# EAGLE board TurnON.v1 (EAGLE 5.11)
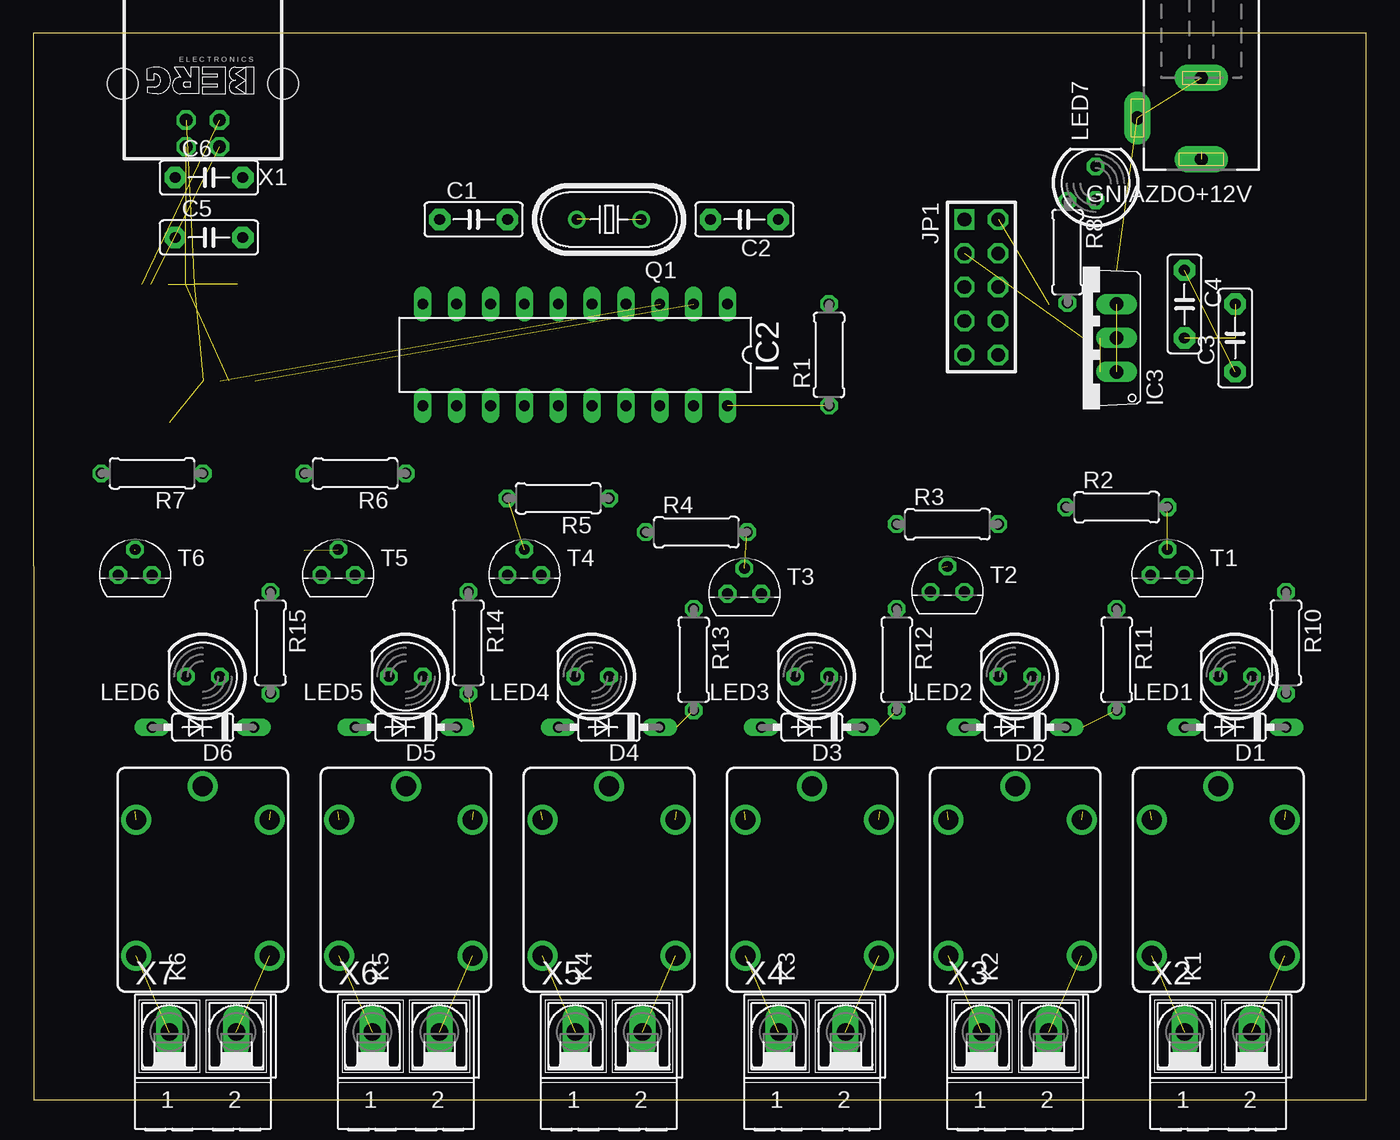
[diagram p0: board, top side]
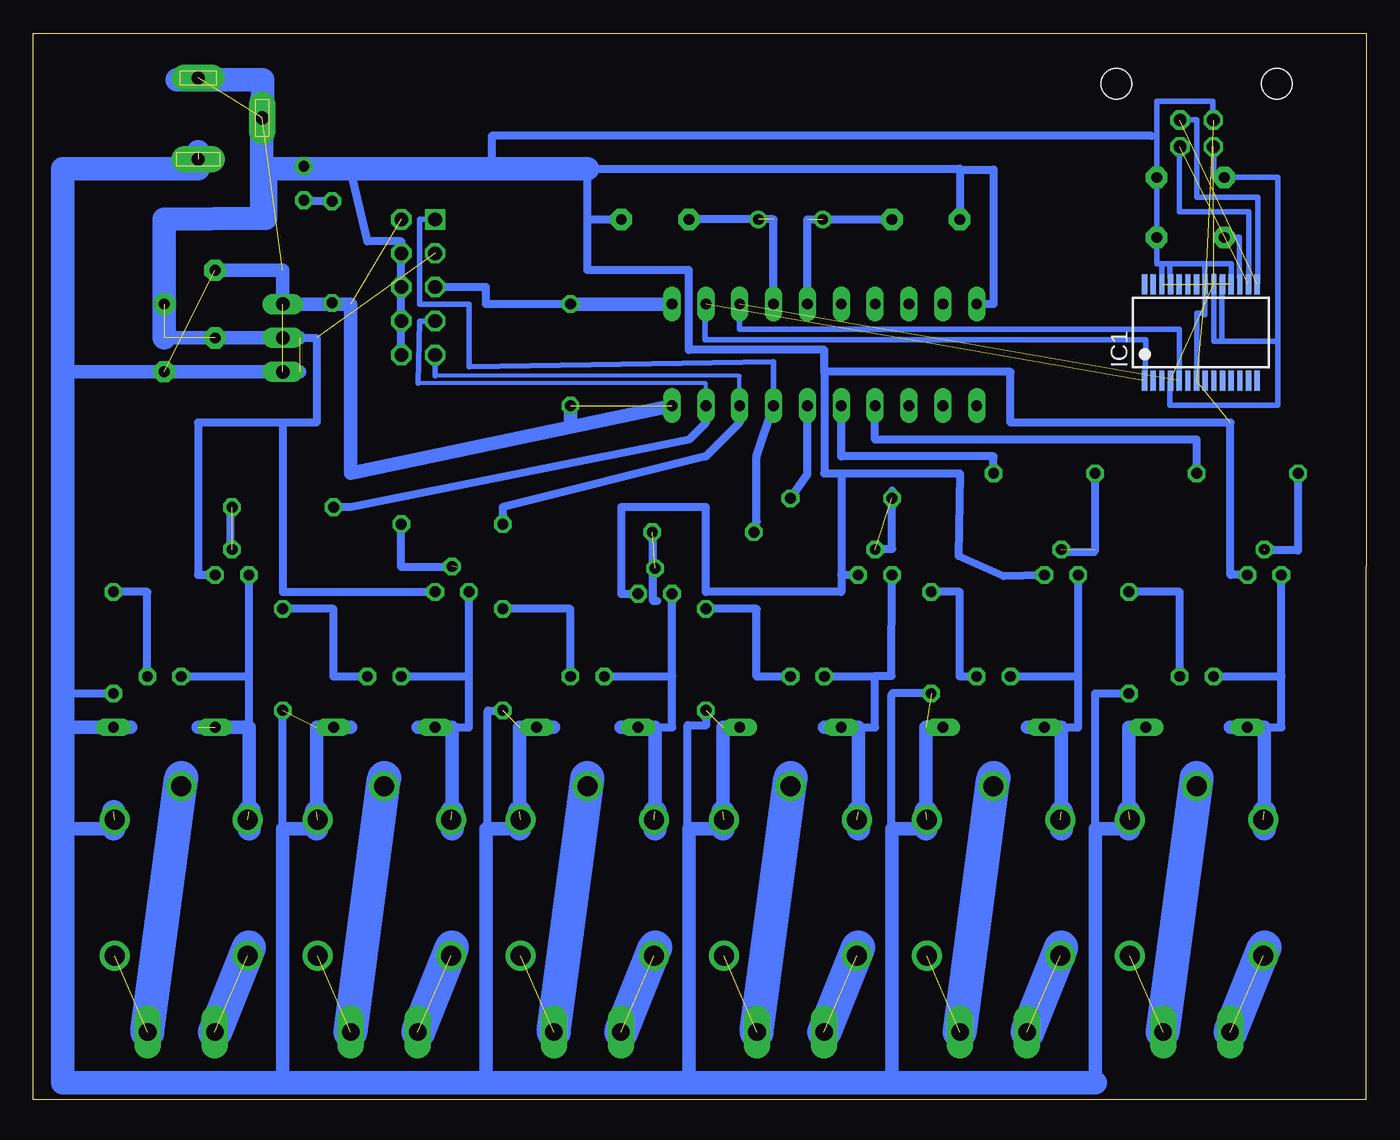
[diagram p1: board, bottom side, seen from below]

Size 100.02 x 80 mm. Coordinates in mm from the lower left corner, seen from the top.
Outline: 0.02,0 100.02,0 100.02,80 0,80 0.02,0
Copper layers (1*16): Top 0.035mm / dielectric 1.5mm / Bottom 0.035mm
Design rules "default": minimum track width 10mil, minimum drill 24mil, track to track 8mil, track to pad 8mil, pad to pad 8mil, via to via 8mil, smd to smd 8mil, copper to edge 40mil, drill to drill 8mil, minimum pad ring 10mil, minimum via ring 8mil, stop-mask expansion 4mil, vias tented up to drill 0mil, thermal gap 10mil

## Footprints (pad centres in the part's own frame; a part is rotated, then mirrored left to right if it is on the bottom)
C5B2.5 = drill 0.813 pad 1.6 octagon: 1 -2.54,0; 2 2.54,0
DO35-7 = drill 0.813 long: A 3.81,0; C -3.81,0
DCJ0202 = drill 1 pad 2 long: 1 0,3.1; 2 4.8,0; 3 0,-3
SSOP28 = smd 0.4 x 1.5: 1 -4.225,-3.625; 2 -3.575,-3.625; 3 -2.925,-3.625; 4 -2.275,-3.625; 5 -1.625,-3.625; 6 -0.975,-3.625; 7 -0.325,-3.625; 8 0.325,-3.625; 9 0.975,-3.625; 10 1.625,-3.625; 11 2.275,-3.625; 12 2.925,-3.625; 13 3.575,-3.625; 14 4.225,-3.625; 15 4.225,3.625; 16 3.575,3.625; 17 2.925,3.625; 18 2.275,3.625; 19 1.625,3.625; 20 0.975,3.625; 21 0.325,3.625; 22 -0.325,3.625; 23 -0.975,3.625; 24 -1.625,3.625; 25 -2.275,3.625; 26 -2.925,3.625; 27 -3.575,3.625; 28 -4.225,3.625
DIL20 = drill 0.813 long: 1 -11.43,-3.81; 2 -8.89,-3.81; 3 -6.35,-3.81; 4 -3.81,-3.81; 5 -1.27,-3.81; 6 1.27,-3.81; 7 3.81,-3.81; 8 6.35,-3.81; 9 8.89,-3.81; 10 11.43,-3.81; 11 11.43,3.81; 12 8.89,3.81; 13 6.35,3.81; 14 3.81,3.81; 15 1.27,3.81; 16 -1.27,3.81; 17 -3.81,3.81; 18 -6.35,3.81; 19 -8.89,3.81; 20 -11.43,3.81
TO220V = drill 1.016 long: 1 -2.54,-2.54; 2 0,-2.54; 3 2.54,-2.54
AVR-ISP-10 = drill 1.016 square: 1 -5.08,-1.27 | drill 1.016 octagon: 2 -5.08,1.27; 3 -2.54,-1.27; 4 -2.54,1.27; 5 0,-1.27; 6 0,1.27; 7 2.54,-1.27; 8 2.54,1.27; 9 5.08,-1.27; 10 5.08,1.27
CQ1 = drill 1.5 round: 1 4.5,-5; 2 4.5,5; C 7,0; NC -5.7,-5; NO -5.7,5
LED5MM = drill 0.813 octagon: A -1.27,0; K 1.27,0
HC49U70 = drill 0.813 round: 1 -2.413,0; 2 2.413,0
0207/7 = drill 0.813 octagon: 1 -3.81,0; 2 3.81,0
TO92 = drill 0.813 octagon: 1 1.27,0; 2 0,1.905; 3 -1.27,0
PN61729 = drill 0.95 octagon: 1 1.25,4.71; 2 -1.25,4.71; 3 -1.25,2.71; 4 1.25,2.71 | hole 2.3: -6.02,0; 6.02,0
AK500/2-H = drill 1.321 long: 1 -2.515,0; 2 2.515,0

## Placement (x,y rotation side)
C1  22pF  [C5B2.5]  33.04,66.04 0 top
C2  [C5B2.5]  53.36,66.04 180 top
C3  0.33uF  [C5B2.5]  90.19,57.15 90 top
C4  0.1uF  [C5B2.5]  86.38,59.69 270 top
C5  100nF  [C5B2.5]  13.18,64.69 0 top
C6  10nF  [C5B2.5]  13.18,69.19 0 top
D1  [DO35-7]  90.19,27.94 180 top
D2  [DO35-7]  73.68,27.94 180 top
D3  [DO35-7]  58.44,27.94 180 top
D4  [DO35-7]  43.2,27.94 180 top
D5  [DO35-7]  27.96,27.94 180 top
D6  [DO35-7]  12.72,27.94 180 top
GNIAZDO+12V  DCJ0202  [DCJ0202]  87.65,73.66 180 top
IC1  FT232RL  [SSOP28]  12.41,57.56 0 bottom
IC2  ATTiny 2313  [DIL20]  40.66,55.88 180 top
IC3  7805TV  [TO220V]  78.76,57.15 90 top
JP1  AVR-ISP-10  [AVR-ISP-10]  71.14,60.96 270 top
K1  CQ1-12V  [CQ1]  88.92,16.51 90 top
K2  CQ1-12V  [CQ1]  73.68,16.51 90 top
K3  CQ1-12V  [CQ1]  58.44,16.51 90 top
K4  CQ1-12V  [CQ1]  43.2,16.51 90 top
K5  CQ1-12V  [CQ1]  27.96,16.51 90 top
K6  CQ1-12V  [CQ1]  12.72,16.51 90 top
LED1  [LED5MM]  90.19,31.75 180 top
LED2  [LED5MM]  73.68,31.75 180 top
LED3  [LED5MM]  58.44,31.75 180 top
LED4  [LED5MM]  41.93,31.75 180 top
LED5  [LED5MM]  27.96,31.75 180 top
LED6  [LED5MM]  12.72,31.75 180 top
LED7  [LED5MM]  79.72,68.75 90 top
Q1  10MHz  [HC49U70]  43.2,66.04 180 top
R1  10k  [0207/7]  59.71,55.88 90 top
R2  1k  [0207/7]  81.3,44.45 0 top
R3  1k  [0207/7]  68.6,43.18 0 top
R4  1k  [0207/7]  49.76,42.58 0 top
R5  1k  [0207/7]  39.39,45.12 180 top
R6  1k  [0207/7]  24.15,46.99 180 top
R7  1k  [0207/7]  8.91,46.99 180 top
R8  150  [0207/7]  77.6,63.59 270 top
R10  1k  [0207/7]  94,34.29 270 top
R11  1k  [0207/7]  81.3,33.02 270 top
R12  1k  [0207/7]  64.79,33.02 270 top
R13  1k  [0207/7]  49.55,33.02 270 top
R14  1k  [0207/7]  32.64,34.29 270 top
R15  1k  [0207/7]  17.8,34.29 270 top
T1  BC337  [TO92]  85.11,39.37 0 top
T2  BC337  [TO92]  68.6,38.1 0 top
T3  BC337  [TO92]  53.36,37.96 0 top
T4  BC337  [TO92]  36.85,39.37 0 top
T5  BC337  [TO92]  22.88,39.37 0 top
T6  BC337  [TO92]  7.64,39.37 0 top
X1  [PN61729]  12.72,76.2 180 top
X2  [AK500/2-H]  88.92,5.08 0 top
X3  [AK500/2-H]  73.68,5.08 0 top
X4  [AK500/2-H]  58.44,5.08 0 top
X5  [AK500/2-H]  43.2,5.08 0 top
X6  [AK500/2-H]  27.96,5.08 0 top
X7  [AK500/2-H]  12.72,5.08 0 top

## Library data of the parts
C1-C6 = capacitor-wima
D1-D6 = diode
GNIAZDO+12V = con-jack; OC_FARNELL: unknown; OC_NEWARK: unknown
IC1 = ftdichip; MPN: FT232RL; OC_FARNELL: 1146032; OC_NEWARK: 91K9918
IC2 = atmel; OC_FARNELL: unknown; OC_NEWARK: unknown
IC3 = linear
JP1 = atmel-isp
K1-K6 = relay; OC_FARNELL: unknown; OC_NEWARK: unknown
LED1-LED7 = led
Q1 = crystal; OC_FARNELL: unknown; OC_NEWARK: unknown
R1-R8 R10-R15 = rcl
T1-T6 = transistor
X1 = con-berg; OC_FARNELL: unknown; OC_NEWARK: unknown
X2-X7 = con-ptr500; OC_FARNELL: unknown; OC_NEWARK: unknown

## Nets
HH: C1.1 C2.1 C3.2 C4.2 D1.C D2.C D3.C D4.C D5.C D6.C GNIAZDO+12V.1 IC1.7 IC1.18 IC1.21 IC1.25 IC1.26 IC2.10 IC3.2 JP1.3 K1.1 K2.1 K3.1 K4.1 K5.1 K6.1 R10.2 R11.2 R12.2 R13.2 R14.2 R15.2 T1.1 T2.1 T3.1 T4.1 T5.1 T6.1 X1.4
N$1: IC2.1 JP1.5 R1.2
N$2: IC1.15 X1.3
N$3: IC1.16 X1.2
N$4: C2.2 IC2.4 Q1.1
N$5: C1.2 IC2.5 Q1.2
N$6: IC1.5 IC2.3
N$7: IC1.1 IC2.2
N$8: R2.2 T1.2
N$9: JP1.4
N$10: JP1.6
N$11: JP1.8
N$12: JP1.10
N$13: R3.2 T2.2
N$14: R4.2 T3.2
N$15: IC2.19 JP1.7 R2.1
N$16: IC2.18 JP1.9 R3.1
N$17: IC2.17 JP1.1 R4.1
N$18: IC2.16 R5.1
N$19: R5.2 T4.2
N$20: IC2.15 R6.1
N$21: IC2.14 R7.1
N$22: K1.NO X2.1
N$24: R6.2 T5.2
N$25: R7.2 T6.2
N$26: K1.NC X2.2
N$27: K2.NO X3.1
N$34: K2.NC X3.2
N$35: K3.NO X4.1
N$36: LED1.A R10.1
N$37: LED2.A R11.1
N$38: LED3.A R12.1
N$39: LED4.A R13.1
N$40: LED5.A R14.1
N$41: LED6.A R15.1
N$42: K3.NC X4.2
N$43: K4.NC X5.2
N$44: IC1.4 IC1.20 X1.1
N$45: K4.NO X5.1
N$46: K5.NC X6.2
N$47: K5.NO X6.1
N$48: K6.NC X7.2
N$49: K6.NO X7.1
N$51: D1.A K1.2 LED1.K T1.3
N$63: D2.A K2.2 LED2.K T2.3
N$64: D3.A K3.2 LED3.K T3.3
N$65: D4.A K4.2 LED4.K T4.3
N$66: D5.A K5.2 LED5.K T5.3
N$67: D6.A K6.2 LED6.K T6.3
VCC: C3.1 C4.1 GNIAZDO+12V.2 GNIAZDO+12V.3 IC2.20 IC3.1 IC3.3 JP1.2 R1.1

## Tracks (layer width: path | path; a pad name or v marks a point on that pad's centre or on a via)
HH  (21 unrouted)
  Bottom 0.61: 58.44,66.04 C2.1 | 58.44,66.04 58.44,69.85 30.5,69.85 30.5,69.78 | 30.5,69.78 C1.1 | T5.1 27.22,39.3 30.6,40.8 30.5,46.99 39.39,46.99 | 39.39,46.99 40.66,46.99 40.66,54.61 | 40.66,54.61 26.69,54.61 26.69,50.8 10.18,50.8 10.18,39.37 T6.1 | 39.39,46.99 39.39,39.37 | 39.39,39.37 39.39,38.1 49.55,38.1 49.55,44.45 55.9,44.45 55.9,37.96 T3.1 | T1.1 87.65,39.37 87.65,50.8 81.3,50.8 | 81.3,50.8 78.76,50.8 78.76,57.15 IC3.2 | T2.1 81.3,38.1 81.3,50.8 | 40.66,54.61 40.66,56.25 50.82,56.25 50.82,62.23 58.44,62.23 58.44,66.04 | IC2.10 27.96,59.69 27.96,69.78 30.5,69.78 | R15.2 20.34,30.48 20.34,20.32 | 97.81,30.48 R10.2 | 39.39,39.37 T4.1
  Bottom 1.016: 97.81,20.32 94,20.32 | 97.81,27.94 D1.C 92.73,27.94 | 81.3,1.27 81.3,20.32 78.76,20.32 | 66.06,1.27 66.06,20.32 63.52,20.32 63.52,27.94 D3.C 60.98,27.94 | 50.82,1.27 50.82,20.32 48.28,20.32 | 35.58,1.27 35.58,20.32 33.04,20.32 | 20.34,1.27 20.34,20.32 17.8,20.32 | 78.76,21.59 78.76,27.94 D2.C 76.22,27.94 | D4.C 48.28,27.94 48.28,21.59 | D5.C 33.04,27.94 33.04,21.59 | D6.C 17.8,27.94 17.8,21.59 | 97.81,54.61 80.03,54.61 | 90.19,57.15 IC3.2 80.03,57.15
  Bottom 1.778: 87.65,71.12 87.65,69.85 97.81,69.85 97.81,54.61 97.81,30.48 97.81,27.94 97.81,20.32 97.81,1.27 81.3,1.27 66.06,1.27 50.82,1.27 35.58,1.27 20.34,1.27 | 94,20.32 94,21.59 | 78.76,20.32 78.76,21.59 | 63.52,20.32 63.52,21.59 | 48.28,20.32 48.28,21.59 | 33.04,20.32 33.04,21.59 | 17.8,20.32 17.8,21.59 | 90.19,57.15 90.19,66.04 82.87,66.14 | 82.87,66.14 82.87,75.03 | 58.44,69.85 82.57,69.85 82.57,66.14 82.87,66.14
N$1
  Bottom 0.61: JP1.5 66.06,60.96 66.06,59.69 R1.2
  Bottom 1.016: IC2.1 R1.2
N$2  (1 unrouted)
N$3  (1 unrouted)
N$4  (1 unrouted)
  Bottom 0.61: IC2.4 44.47,66.04 C2.2
N$5  (1 unrouted)
  Bottom 0.61: IC2.5 41.93,66.04 C1.2
N$6  (1 unrouted)
N$7  (1 unrouted)
N$8  (1 unrouted)
N$12
  Bottom 0.61: JP1.10 72.41,64.39 74.95,64.39 76.25,69.92
N$13  (1 unrouted)
  Bottom 0.61: R3.2 72.41,39.95 68.21,39.95
N$14  (1 unrouted)
N$15
  Bottom 0.305: 71.14,53.74 49.55,53.74 IC2.19
  Bottom 0.406: JP1.7 71.04,58.42 71.14,53.74
  Bottom 0.61: IC2.19 49.55,50.8 50.82,49.53 76.22,44.45 R2.1
N$16
  Bottom 0.305: 69.87,54.31 47.01,54.31 IC2.18
  Bottom 0.406: 69.87,54.31 JP1.9
  Bottom 0.61: IC2.18 47.01,50.8 49.55,48.26 64.79,44.45 R3.1
N$17
  Bottom 0.406: JP1.1 71.04,66.04 71.04,59.69 67.33,59.69 67.33,54.98 44.47,55.38 IC2.17
  Bottom 0.61: IC2.17 45.74,48.26 45.74,43.36 R4.1
N$18
  Bottom 0.61: IC2.16 41.93,46.91 R5.1
N$19  (1 unrouted)
N$20
  Bottom 0.61: IC2.15 39.39,48.26 27.96,48.26 R6.1
N$21
  Bottom 0.61: IC2.14 36.85,49.53 12.72,49.53 R7.1
N$22  (1 unrouted)
N$23
  Bottom 0.61: 53.51,42.65 53.51,37.41 53.21,37.41
N$24  (1 unrouted)
  Bottom 0.61: 20.34,41.22 R6.2
N$25  (1 unrouted)
  Bottom 0.61: R7.2 5.1,41.22 7.61,41.22
N$26  (1 unrouted)
N$27  (1 unrouted)
N$28
  Bottom 0.61: 35.62,19.2 35.62,30.4
N$29
  Bottom 0.61: 35.58,30.48 32.54,30.48 32.52,30.5
N$30
  Bottom 0.61: 50.92,20.2 50.92,28.1 49.52,28.1 49.52,29.5
N$31
  Bottom 0.61: 65.92,20.3 65.92,29.2 64.62,29.2
N$32
  Bottom 0.61: 81.22,20.3 81.32,20.3 81.32,29.5
N$33
  Bottom 0.61: 20.42,41.1 22.82,41.1 22.82,41.4
N$34  (1 unrouted)
N$35  (1 unrouted)
N$36
  Bottom 0.61: R10.1 91.46,38.1 LED1.A
N$37
  Bottom 0.61: R11.1 77.49,36.83 77.49,31.75 LED2.A
N$38
  Bottom 0.61: R12.1 59.71,36.83 LED3.A
N$39
  Bottom 0.61: R13.1 45.74,36.83 45.74,31.75 LED4.A
N$40
  Bottom 0.61: R14.1 30.5,38.1 30.5,31.75 LED5.A
N$41
  Bottom 0.61: LED6.A 13.99,38.1 R15.1
N$42  (1 unrouted)
N$43  (1 unrouted)
N$44  (2 unrouted)
N$45  (1 unrouted)
N$46  (1 unrouted)
N$47  (1 unrouted)
N$48  (1 unrouted)
N$49  (1 unrouted)
N$50
  Bottom 2.54: 60.98,5.08 58.44,24.13
N$51  (2 unrouted)
  Bottom 0.61: 83.84,27.94 83.84,31.75 | 83.84,31.75 T1.3 | 83.84,31.75 LED1.K
  Bottom 1.016: 83.84,21.59 83.84,27.94 87.65,27.94
  Bottom 1.778: 83.84,21.59 83.84,20.32
N$52
  Bottom 2.54: 76.22,5.08 73.68,24.13
N$53
  Bottom 2.54: 91.46,5.08 88.92,24.13
N$54
  Bottom 2.54: 45.74,5.08 43.2,24.13
N$55
  Bottom 2.54: 30.5,5.08 27.96,24.13
N$56
  Bottom 2.54: 15.26,5.08 12.72,24.13
N$57
  Bottom 2.54: 86.38,5.08 83.84,11.43
N$58
  Bottom 2.54: 71.14,5.08 68.6,11.43
N$59
  Bottom 2.54: 55.9,5.08 53.36,11.43
N$60
  Bottom 2.54: 40.66,5.08 38.12,11.43
N$61
  Bottom 2.54: 25.42,5.08 22.88,11.43
N$62
  Bottom 2.54: 10.18,5.08 7.64,11.43
N$63  (1 unrouted)
  Bottom 0.61: 67.33,31.75 67.33,27.94 D2.A | 67.33,31.75 T2.3 | 67.33,31.75 LED2.K
  Bottom 1.016: 68.6,21.59 68.6,27.94 D2.A 71.14,27.94
  Bottom 1.778: 68.6,21.59 68.6,20.32
N$64  (1 unrouted)
  Bottom 0.61: 52.09,31.75 52.09,27.94 D3.A | 52.09,31.75 T3.3 | 52.09,31.75 LED3.K
  Bottom 1.016: 53.36,21.59 53.36,27.94 D3.A 55.9,27.94
  Bottom 1.778: 53.36,21.59 53.36,20.32
N$65  (1 unrouted)
  Bottom 0.61: 36.85,31.75 36.85,27.94 D4.A | 36.85,31.75 36.85,31.8 35.62,31.8 T4.3 | 36.85,31.75 LED4.K
  Bottom 1.016: 38.12,21.59 38.12,27.94 D4.A 40.66,27.94
  Bottom 1.778: 38.12,21.59 38.12,20.32
N$66  (1 unrouted)
  Bottom 0.61: 21.61,31.75 21.61,27.94 D5.A | 21.61,31.75 T5.3 | 21.61,31.75 LED5.K
  Bottom 1.016: 22.88,21.59 22.88,27.94 D5.A 25.42,27.94
  Bottom 1.778: 22.88,21.59 22.88,20.32
N$67  (1 unrouted)
  Bottom 0.61: 6.37,31.75 6.37,27.94 D6.A | 6.37,31.75 T6.3 | 6.37,31.75 LED6.K
  Bottom 1.016: 7.64,20.32 7.64,27.94 D6.A 10.18,27.94
  Bottom 1.778: 7.64,20.32 7.64,21.59
N$68
  Bottom 0.61: 35.58,45.72 35.58,41.3 36.92,41.3
N$69
  Bottom 0.61: 85.22,41.4 85.22,44.4
N$70
  Bottom 0.406: 14.02,71.5 14.02,66.6 8.82,66.6 8.82,61.7
N$71
  Bottom 0.406: 14.02,73.5 12.72,73.5 12.72,67.7 8.12,67.7 8.12,61.3
N$72
  Bottom 0.406: 11.52,73.4 11.52,74.9 15.72,74.9 15.72,62.7 15.32,62.7 | 12.12,62.7 15.32,62.7 | 12.12,59 12.12,58.9 | 12.12,59 12.12,62.7 | 12.12,59 12.72,59 12.72,53.4 | 15.32,62.7 15.32,61.7 | 10.12,61.6 10.12,62.7 12.12,62.7
N$73
  Bottom 0.406: 11.42,71.5 11.42,69.2 6.62,69.2 6.62,56.9 | 6.62,56.9 11.42,56.9 11.42,61.8 | 6.62,56.9 6.62,52.1 14.72,52.1 14.72,53.8
N$74
  Bottom 0.406: 16.62,53.5 16.52,57 49.62,57 49.62,59.7
N$75
  Bottom 0.406: 14.02,53.5 14.02,57.8 47.02,57.8 47.02,59.7
S$1
  Bottom 0.406: 14.72,61.7 14.72,62.6
S$2
  Bottom 0.406: 10.82,57 10.82,61.7
S$3
  Bottom 0.406: 9.52,61.7 9.52,64.7 10.82,64.7
S$4
  Bottom 0.61: 77.72,67.4 79.82,67.4
S$5
  Bottom 0.61: 16.12,72.3 65.62,72.3 65.62,70
S$6
  Bottom 1.778: 89.22,76.5 82.82,76.5 82.82,73
VCC  (6 unrouted)
  Bottom 1.016: IC2.20 76.22,46.99 76.22,59.69 IC3.3 81.3,62.23 C4.1 | R1.1 59.71,50.8